# Altium PCB PCB走線.pcbdoc (part 1 of 2)
Units mm, origin at the board's own origin, x right, y up, seen from the top; angles counter-clockwise.
Board outline 119.98 x 131.06 mm, 2 copper layers (Top Layer, Bottom Layer); 151 components, 85 nets, 449 pads, 663 vias.
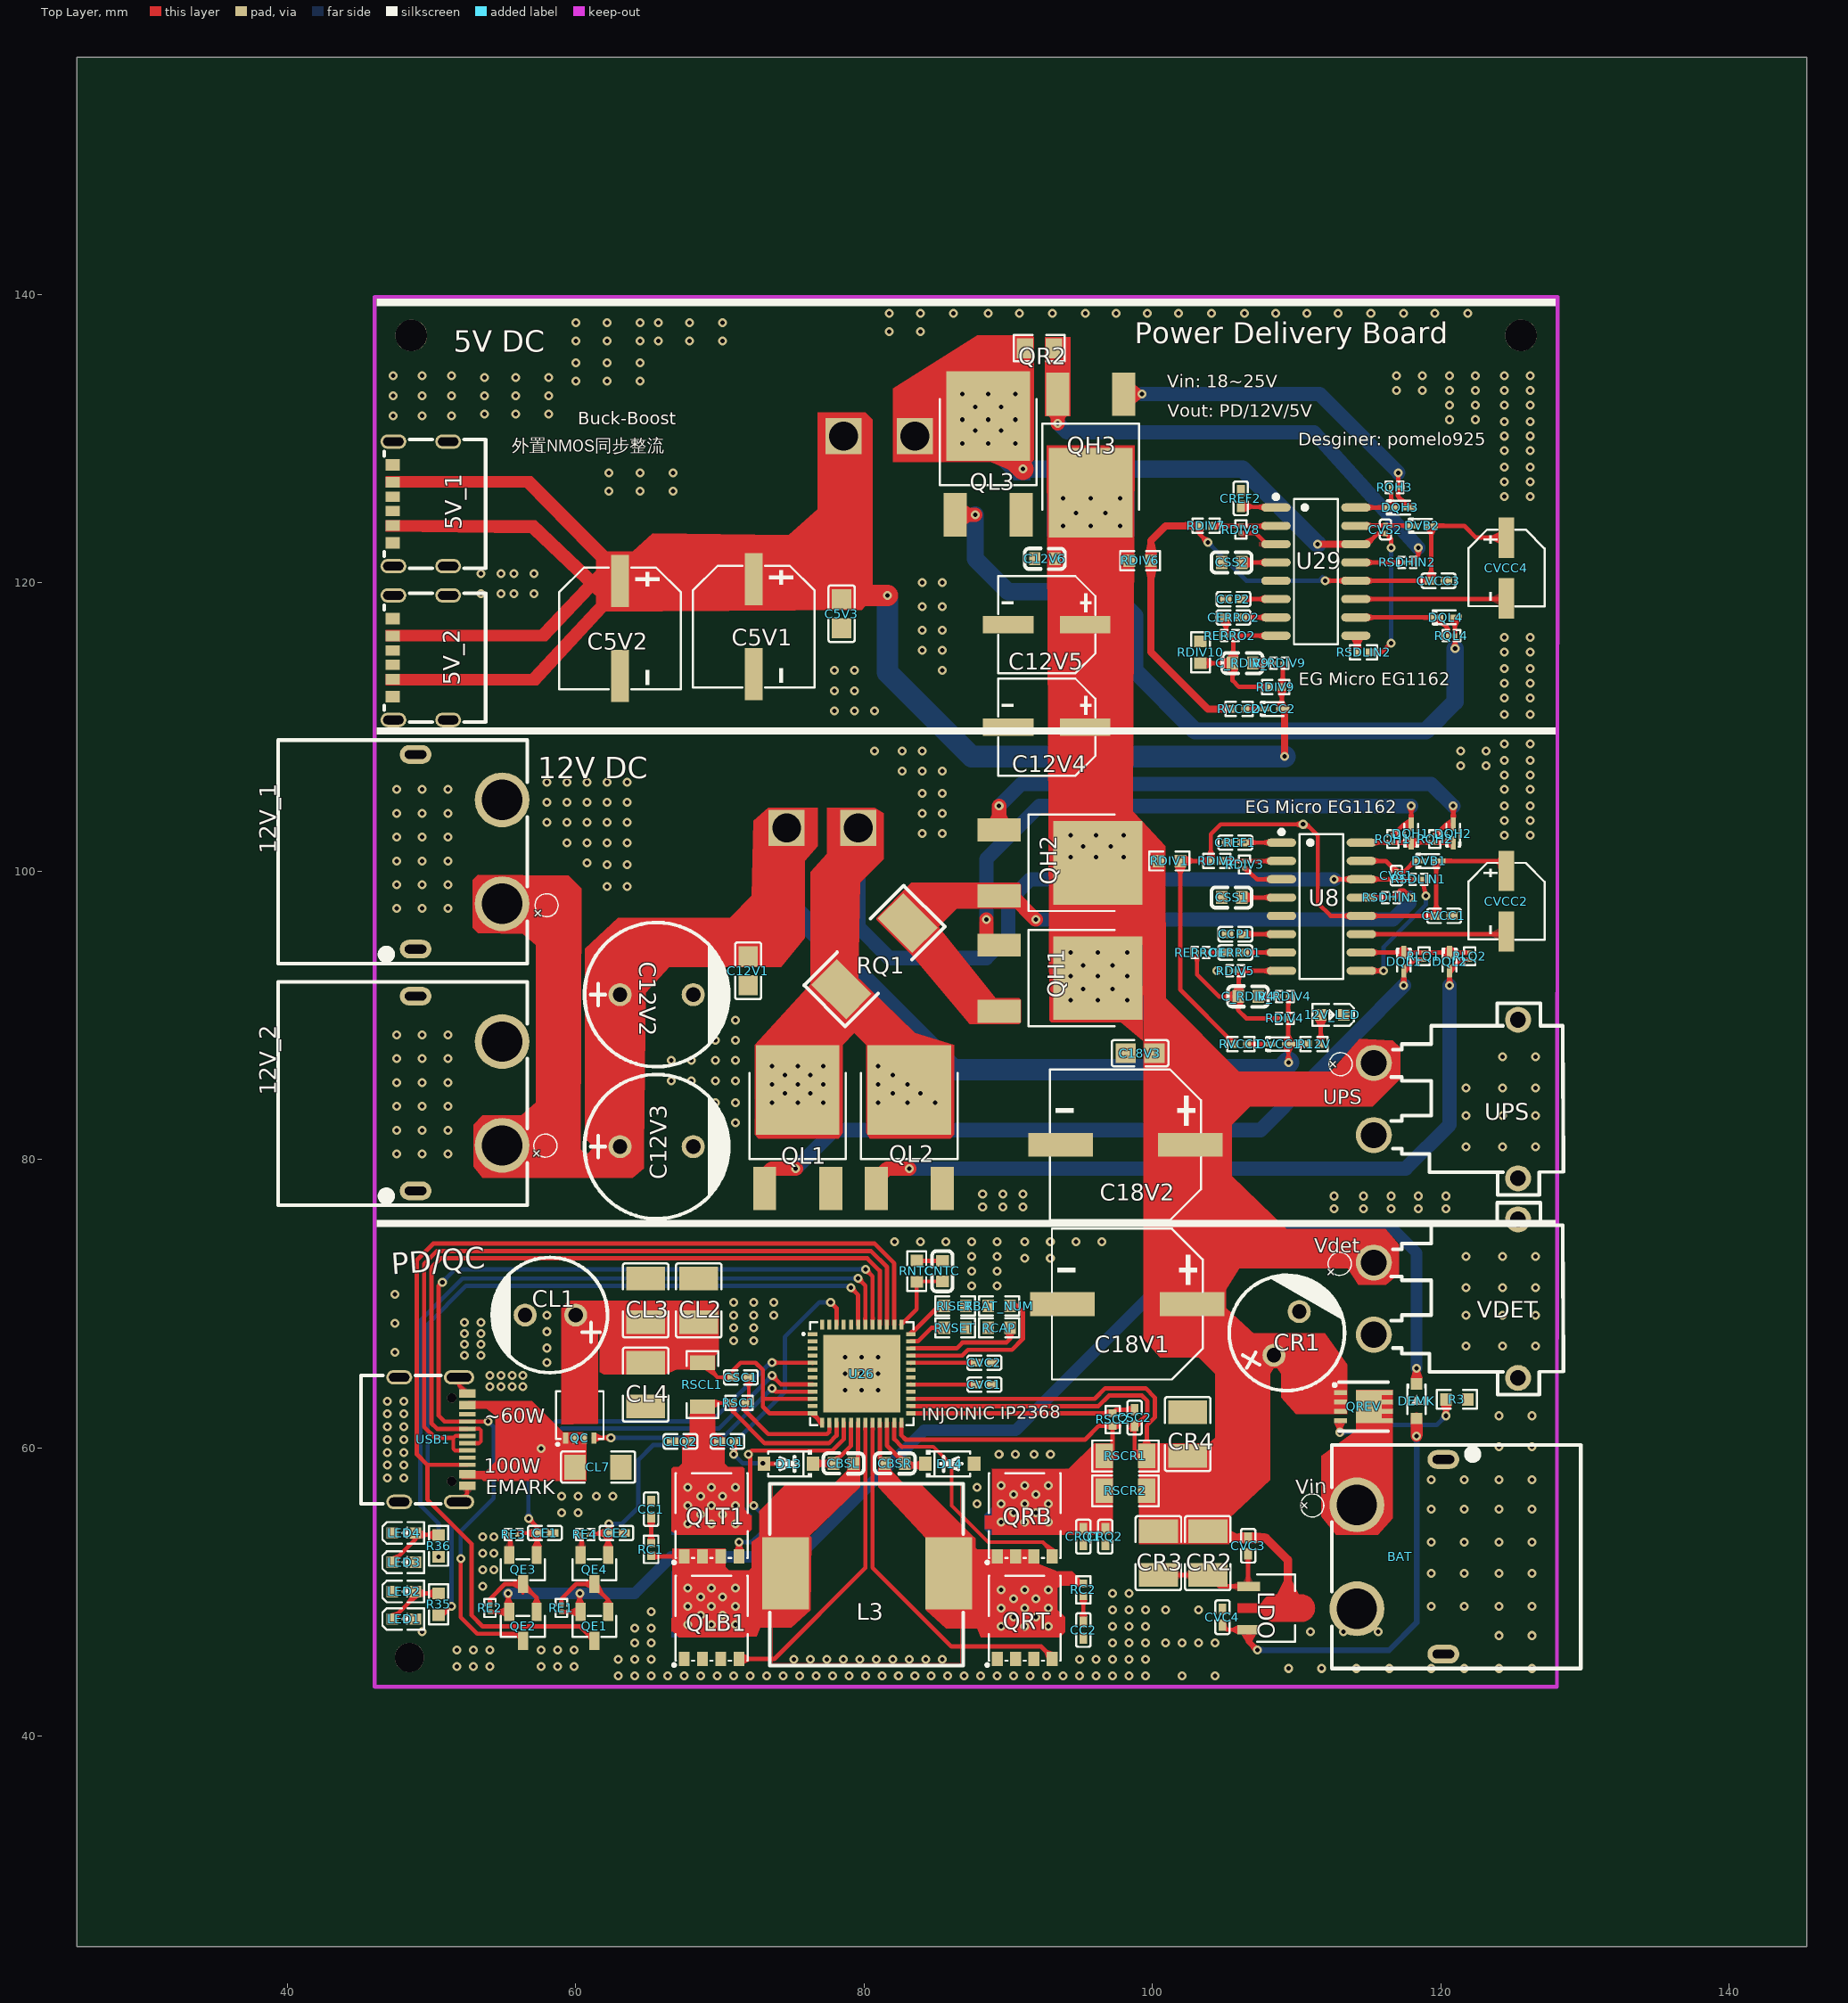
[diagram p0: Top Layer view]
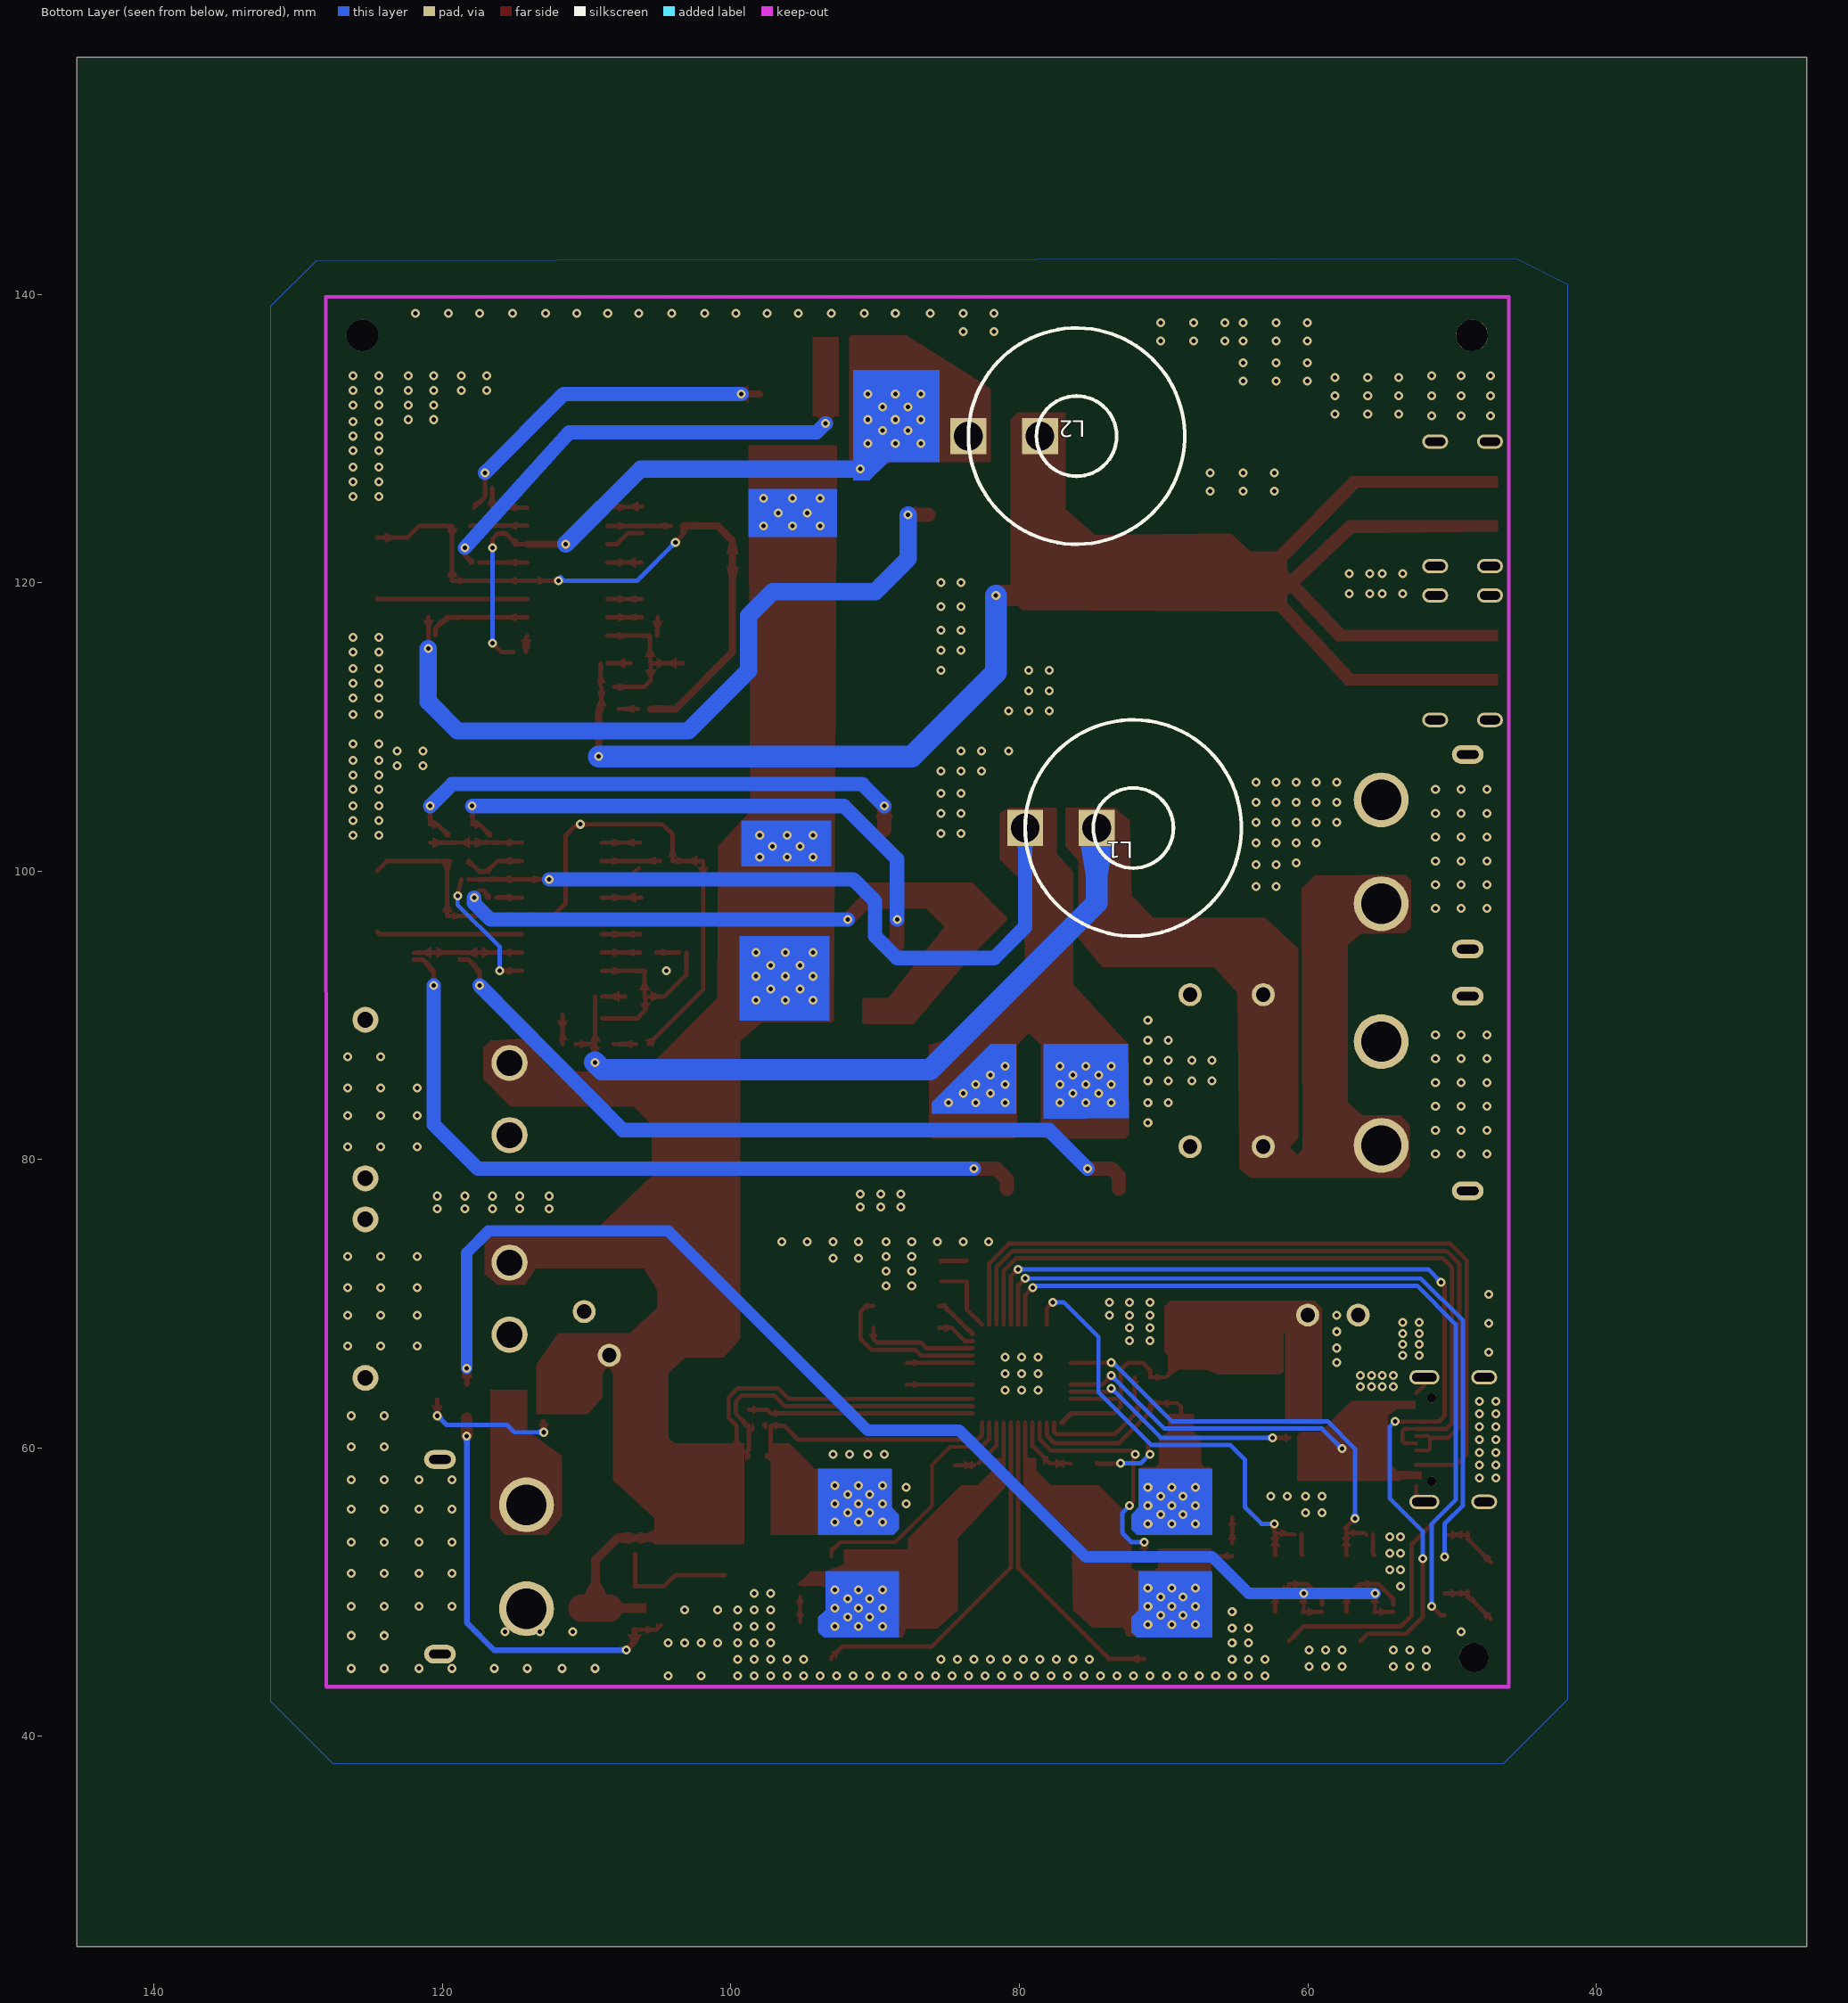
[diagram p1: Bottom Layer view, seen from below]

## Layer stack, top to bottom
Top Layer: signal copper (thickness not stored)
Dielectric: dielectric 0.32, FR-4, Dk 4.8
Bottom Layer: signal copper (thickness not stored)

## Board outline
145.377,25.4 25.4,25.4 25.4,156.464 145.377,156.464

## Components (designator, comment, footprint, x,y, rotation, side; value= is the part's Value field where it differs from the comment)
5V_1 "TYPE-C 6P" USB-C-SMD_TYPE-C-6P 49.238,125.476 r90 top
5V_2 "TYPE-C 6P" USB-C-SMD_TYPE-C-6P 49.238,114.808 r90 top
12V_1 "XT60PW-F" TH_2P-XT60PW-F 51.905,101.346 r90 top
12V_2 "XT60PW-F" TH_2P-XT60PW-F 51.905,84.582 r90 top
12V_LED "XL-1608UGC" LED0603-RD_GREEN 112.484,90.043 r180 top
BAT "XT60PW-F" TH_2P-XT60PW-F 117.183,52.451 r270 top
C5V1 "1000uF/10V" CAP-SMD_BD8.0-L8.3-W8.3-LS9.1-FD 72.352,116.967 r270 top
C5V2 "1000uF/10V" CAP-SMD_BD8.0-L8.3-W8.3-LS9.1-FD 63.081,116.84 r270 top
C5V3 "1uF/35V" C0805 78.448,117.856 r270 top
C12V1 "1uF/35V" C0805 71.971,93.091 r270 top
C12V2 "1000uF/25V" CAP-TH_BD10.0-P5.00-D1.0-FD 65.621,91.44 r0 top
C12V3 "1000uF/25V" CAP-TH_BD10.0-P5.00-D1.0-FD 65.621,80.899 r0 top
C12V4 "100uF" CAP-SMD_BD6.3-L6.6-W6.6-FD 92.672,109.982 r180 top
C12V5 "100uF" CAP-SMD_BD6.3-L6.6-W6.6-FD 92.672,117.094 r180 top
C12V6 "100nF" C0603 92.545,121.666 r0 top
C18V1 "470uF" CAP-SMD_BD10.0-L10.3-W10.3-FD 98.26,69.977 r180 top
C18V2 "470uF" CAP-SMD_BD10.0-L10.3-W10.3-FD 98.133,81.026 r180 top
C18V3 "1uF/35V" C0805 99.149,87.376 r180 top
C_RDIV4 "10nF/50V/1%" C0603 106.642,91.313 r0 top
C_RDIV9 "10nF/50V/1%" C0603 106.261,114.427 r0 top
CBSL "100nF" C0603 78.575,58.928 r180 top
CBSR "100nF" C0603 82.131,58.928 r180 top
CC1 "1.5nF" C0402 65.24,55.753 r90 top
CC2 "1.5nF" C0402 95.212,47.371 r270 top
CCP1 "68pF" C0402 105.753,95.631 r0 top
CCP2 "68pF" C0402 105.626,118.872 r0 top
CE1 "100nF" C0402 57.874,54.102 r180 top
CE2 "100nF" C0402 62.827,54.102 r180 top
CERRO1 "10nF/35V" C0402 105.753,94.361 r0 top
CERRO2 "10nF/35V" C0402 105.626,117.602 r0 top
CL1 "220uF" CAP-TH_BD8.0-P3.50-D0.6-FD 58.255,69.215 r180 top
CL2 "22uF" C1210 68.542,70.231 r270 top
CL3 "22uF" C1210 64.859,70.231 r270 top
CL4 "22uF" C1210 64.859,64.389 r90 top
CL7 "10uF" C1206 61.557,58.674 r180 top
CLQ1 "100nF" C0402 70.53,60.452 r180 top
CLQ2 "100nF" C0402 67.272,60.452 r0 top
CNTC "100nF" C0603 85.433,72.263 r90 top
CR1 "220uF" CAP-TH_BD8.0-P3.50-D0.6-FD 109.309,67.945 r60 top
CR2 "22uF" C1210 103.848,52.705 r90 top
CR3 "22uF" C1210 100.419,52.705 r90 top
CR4 "22uF" C1210 102.451,60.96 r270 top
CREF1 "100nF/35V" C0402 105.753,101.981 r180 top
CREF2 "100nF/35V" C0402 106.134,125.857 r90 top
CRQ1 "100nF" C0402 95.212,53.848 r90 top
CRQ2 "100nF" C0402 96.736,53.848 r90 top
CSC1 "1uF" C0402 71.463,64.897 r0 top
CSC2 "1uF" C0402 98.768,62.103 r90 top
CSS1 "100pF/50V" C0603 105.499,98.171 r0 top
CSS2 "100pF/50V" C0603 105.499,121.412 r0 top
CVC1 "2.2uF" C0402 88.354,64.389 r180 top
CVC2 "2.2uF" C0402 88.354,65.913 r180 top
CVC3 "2.2uF" C0402 106.642,53.213 r90 top
CVC4 "2.2uF" C0402 104.864,48.26 r270 top
CVCC1 "100nF/35V" C0402 120.231,96.901 r0 top
CVCC2 "10uF/50V" CAP-SMD_BD5.0-L5.3-W5.3-LS6.0-FD 124.549,97.917 r270 top
CVCC3 "100nF/35V" C0402 119.85,120.142 r0 top
CVCC4 "10uF/50V" CAP-SMD_BD5.0-L5.3-W5.3-FD 124.549,121.031 r270 top
CVS1 "1uF" C0201 116.929,99.695 r270 top
CVS2 "1uF" C0201 116.167,123.698 r270 top
D13 "SMF30A" SOD-123_L2.6-W1.6-LS3.5-RD 74.765,58.901 r180 top
D14 "SMF30A" SOD-123_L2.6-W1.6-LS3.5-RD 85.941,58.901 r0 top
DEMK "1SS355" SOD-323F_L1.7-W1.3-LS2.5-RD 118.326,63.246 r270 top
DQH1 "1N4148" SOD-523_L1.2-W0.8-LS1.6-RD 117.945,102.616 r90 top
DQH2 "1N4148" SOD-523_L1.2-W0.8-LS1.6-RD 120.866,102.616 r90 top
DQH3 "1N4148" SOD-523_L1.2-W0.8-LS1.6-RD 117.183,125.222 r0 top
DQL1 "1N4148" SOD-523_L1.2-W0.8-LS1.6-RD 117.437,93.726 r270 top
DQL2 "1N4148" SOD-523_L1.2-W0.8-LS1.6-RD 120.612,93.726 r270 top
DQL4 "1N4148" SOD-523_L1.2-W0.8-LS1.6-RD 120.358,117.602 r0 top
DVB1 "1N4148" SOD-523_L1.2-W0.8-LS1.6-RD 119.215,100.711 r0 top
DVB2 "1N4148" SOD-523_L1.2-W0.8-LS1.6-RD 118.707,123.952 r0 top
DVCC1 "1N4148" SOD-523_L1.2-W0.8-LS1.6-RD 108.801,88.011 r0 top
DVCC2 "1N4148" SOD-523_L1.2-W0.8-LS1.6-RD 108.42,111.252 r0 top
L1 "47uH/40A" 鐵硅鋁電感 72.098,102.997 r180 bottom
L2 "33uH/40A" 鐵硅鋁電感 76.035,130.175 r180 bottom
L3 "5.6uH/13A" IND-SMD_L13.4-W12.6 80.226,51.308 r0 top
LDO "ME6203A50PG" SOT-89_L4.5-W2.5-P1.50-LS4.2-BR 108.039,48.895 r180 top
LED1 "75%" LED0603-RD 48.095,48.133 r0 top
LED2 "100%" LED0603-RD 48.095,50.038 r0 top
LED3 "75%" LED0603-RD 48.095,52.07 r0 top
LED4 "100%" LED0603-RD 48.095,54.102 r0 top
QC "WSD3066DN33" DFN-8_L3.3-W3.3-P0.65-BL 60.287,61.468 r0 top
QE1 "2301" SOT-23-3_L2.9-W1.3-P1.90-LS2.4-BR 61.303,47.625 r90 top
QE2 "2301" SOT-23-3_L2.9-W1.3-P1.90-LS2.4-BR 56.35,47.625 r90 top
QE3 "2N7002" SOT-23-3_L2.9-W1.3-P1.90-LS2.4-BR 56.35,51.562 r90 top
QE4 "2N7002" SOT-23-3_L2.9-W1.3-P1.90-LS2.4-BR 61.303,51.562 r90 top
QH1 "AP90N04K" TO-252-2_L6.6-W6.1-P4.57-LS9.9-BR-CW 92.799,92.583 r180 top
QH2 "AP90N04K" TO-252-2_L6.6-W6.1-P4.57-LS9.9-BR-CW 92.799,100.584 r180 top
QH3 "AP90N04K" TO-252-2_L6.6-W6.1-P4.57-LS9.9-BR-CW 95.72,129.667 r90 top
QL1 "AP90N04K" TO-252-2_L6.6-W6.1-P4.57-LS9.9-BR-CW 75.4,81.407 r270 top
QL2 "AP90N04K" TO-252-2_L6.6-W6.1-P4.57-LS9.9-BR-CW 83.147,81.407 r270 top
QL3 "AP90N04K" TO-252-2_L6.6-W6.1-P4.57-LS9.9-BR-CW 88.608,128.143 r270 top
QLB1 "5C670" DFN-5_L6.1-W5.1-P1.27-BL 69.431,47.244 r0 top
QLT1 "5C670" DFN-5_L6.1-W5.1-P1.27-BL 69.431,54.356 r0 top
QR2 "9mΩ" R0805 92.164,136.271 r0 top
QRB "5C670" DFN-5_L6.1-W5.1-P1.27-BL 91.148,54.356 r0 top
QREV "BSZ120P03NS3GATMA1" PG-TSDSON-8_L3.3-W3.3-P0.65-BL 114.643,62.865 r270 top
QRT "5C670" DFN-5_L6.1-W5.1-P1.27-BL 91.148,47.244 r0 top
R3 "2kΩ" R0603 121.12,63.373 r180 top
R12V "2.1kΩ" R0402 111.214,88.011 r0 top
R35 "100Ω" R0603 50.508,49.149 r270 top
R36 "100Ω" R0603 50.508,53.213 r270 top
R_RDIV4 "510Ω/25V" R0201 109.182,91.313 r0 top
R_RDIV9 "510Ω/25V" R0201 108.801,114.427 r0 top
RBAT_NUM "18kΩ" R0603 89.37,69.85 r180 top
RC1 "2Ω" R0402 65.24,52.959 r90 top
RC2 "2Ω" R0402 95.212,50.165 r270 top
RCAP "7.5kΩ" R0603 89.37,68.326 r180 top
RDIV1 "16.9kΩ" R0603 101.181,100.711 r180 top
RDIV2 "56kΩ" R0402 104.483,100.711 r180 top
RDIV3 "4.22kΩ" R0201 106.388,100.457 r90 top
RDIV4 "9.1kΩ/1%" R0201 109.182,89.789 r0 top
RDIV5 "1kΩ/1%" R0201 105.753,93.091 r180 top
RDIV6 "16.9kΩ" R0603 99.149,121.539 r0 top
RDIV7 "56kΩ" R0402 103.721,123.952 r180 top
RDIV8 "4.22kΩ/25V" R0201 106.134,123.698 r90 top
RDIV9 "3.9kΩ/50V" R0402 108.547,112.776 r0 top
RDIV10 "1.2kΩ" R0603 103.34,115.189 r270 top
RE1 "10kΩ" R0201 59.017,48.895 r270 top
RE2 "10kΩ" R0201 54.064,48.895 r270 top
RE3 "1MΩ" R0201 55.715,53.994 r180 top
RE4 "1MΩ" R0201 60.668,53.994 r180 top
RERRO1 "100kΩ/30V" R0201 103.34,94.361 r0 top
RERRO2 "100kΩ/30V" R0201 105.372,116.332 r180 top
RISET "25kΩ" R0603 86.322,69.85 r0 top
RLQ1 "15Ω" R0201 118.834,94.107 r270 top
RLQ2 "15Ω" R0201 122.009,94.107 r270 top
RNTC "10kΩ" R0603 83.655,72.263 r90 top
RQ1 "6mΩ" RES-SMD_L6.4-W3.2 80.734,94.107 r45 top
RQH1 "15Ω" R0201 116.675,102.235 r90 top
RQH2 "15Ω" R0201 119.596,102.235 r90 top
RQH3 "5.1Ω/25V" R0201 116.802,126.619 r0 top
RQL4 "5.1Ω/25V" R0201 120.739,116.332 r0 top
RSC1 "10Ω" R0402 71.336,63.119 r0 top
RSC2 "10Ω" R0402 97.244,61.976 r90 top
RSCL1 "5mΩ" RES-SMD_L3.2-W1.6_PA1206 68.796,64.389 r270 top
RSCR1 "10mΩ" R1206 98.133,59.436 r0 top
RSCR2 "10mΩ" R1206 98.133,57.023 r0 top
RSDHIN1 "10kΩ" R0201 116.548,98.171 r0 top
RSDHIN2 "10kΩ" R0201 117.691,121.412 r0 top
RSDLIN1 "100kΩ/30V" R0201 118.453,99.441 r180 top
RSDLIN2 "100kΩ/50V" R0402 114.643,115.189 r0 top
RVCC1 "5.1Ω/50V" R0402 106.134,88.011 r180 top
RVCC2 "5.1Ω/50V" R0402 106.007,111.252 r180 top
RVSET "10kΩ" R0603 86.322,68.326 r0 top
U8 "EG1162" SOP-16_L9.9-W3.9-P1.27-LS6.0-BL 111.722,97.536 r270 top
U26 "IP2368_BZ_VGLIP" QFN-48_L7.0-W7.0-P0.50-TL-EP5.4-1 79.845,65.151 r0 top
U29 "EG1162" SOP-16_L9.9-W3.9-P1.27-LS6.0-BL 111.341,120.777 r270 top
UPS "XT30PW-M" CONN-TH_XT30PW-M 120.358,84.201 r90 top
USB1 "TYPE-C16PIN" USB-C-SMD_TYPE-C16PIN 50.127,60.579 r270 top
VDET "XT30PW-M" CONN-TH_XT30PW-M 120.358,70.358 r90 top

## Footprints (in the part's own frame and the unit in brackets; to place one, negate y for a bottom-side part, rotate by r counter-clockwise, add the part's x,y. Pads: shape width x height; smd on the part's side, far side on the other; paste and mask are expansions set on the pad)
C0201 [mm]
  rect 0.368x0.324 smd paste-100 mask+0.051: 1(-0.274,0) 2(0.274,0)
  silkscreen extent -0.69,-0.39 0.69,0.39
C0402 [mm]
  rect 0.79x0.54 smd paste-100 mask+0.051: 1(-0.545,0) 2(0.545,0)
  silkscreen extent -1.17,-0.5 1.17,0.5
C0603 [mm]
  rect 0.8x0.9 smd paste+0 mask+0.051: 1(-0.7,0) 2(0.7,0)
  silkscreen extent -1.41,-0.71 1.39,0.72
C0805 [mm]
  rect 1.41x1.35 smd paste-100 mask+0.051: 1(-1,0) 2(1,0)
  silkscreen extent -1.96,-0.9 1.96,0.9
C1206 [mm]
  rect 1.485x1.728 smd paste-100 mask+0.051: 1(-1.593,0) 2(1.593,0)
  silkscreen extent -2.56,-1.09 2.56,1.09
C1210 [mm]
  rect 1.635x2.7 smd paste-100 mask+0.051: 1(-1.517,0) 2(1.517,0)
  silkscreen extent -2.56,-1.58 2.56,1.58
CAP-SMD_BD5.0-L5.3-W5.3-FD [mm]
  rect 2.8x1.1 smd paste+0 mask+0.051: 1(-2.1,0) 2(2.1,0)
  silkscreen extent -2.66,-2.62 2.66,2.65
CAP-SMD_BD5.0-L5.3-W5.3-LS6.0-FD [mm]
  rect 2.8x1.1 smd paste+0 mask+0.051: 1(-2.1,0) 2(2.1,0)
  silkscreen extent -2.66,-2.62 2.66,2.65
CAP-SMD_BD6.3-L6.6-W6.6-FD [mm]
  rect 3.5x1.2 smd paste+0 mask+0.051: 1(-2.67,0) 2(2.67,0)
  silkscreen extent -3.38,-3.38 3.38,3.38
CAP-SMD_BD8.0-L8.3-W8.3-LS9.1-FD [mm]
  rect 3.61x1.26 smd paste+0 mask+0.051: 1(-3.295,0) 2(3.295,0)
  silkscreen extent -4.23,-4.23 4.23,4.23
CAP-SMD_BD10.0-L10.3-W10.3-FD [mm]
  rect 4.5x1.65 smd paste+0 mask+0.051: 1(-4.5,0) 2(4.5,0)
  silkscreen extent -5.23,-5.23 5.23,5.23
CAP-TH_BD8.0-P3.50-D0.6-FD [mm]
  round 1.6 hole 1 paste+0 mask+0.051: 1(-1.75,0) 2(1.75,0)
  silkscreen extent -3.96,-4 4.04,4
CAP-TH_BD10.0-P5.00-D1.0-FD [mm]
  round 1.6 hole 1 paste+0 mask+0.051: 1(-2.54,0) 2(2.54,0)
  silkscreen extent -5,-5 5.08,5
CONN-TH_XT30PW-M [mm]
  round 2.5 hole 1.8 paste+0 mask+0.051: 1(-2.5,5) 2(2.5,5)
  round 1.8 hole 1.1 paste+0 mask+0.051: 3(5.5,-5) 4(-5.5,-5)
  silkscreen extent -6.65,-8.15 6.65,3.81
DFN-5_L6.1-W5.1-P1.27-BL [mm]
  rect 0.75x1 smd paste+0 mask+0.051: 1(-1.905,-1.875) 2(-0.635,-1.875) 3(0.635,-1.875) 4(1.905,-1.875)
  Top Layer region: -2.28,-0.39 -2.28,0.035 -2.775,0.035 -2.775,0.94 -2.28,0.94 -2.28,4.14 -1.53,4.14 -1.53,3.64 1.53,3.64 1.53,4.14 2.28,4.14 2.28,0.94 2.775,0.94 2.775,0.035 2.28,0.035 2.28,-0.39
  silkscreen extent -2.7,-2.4 2.5,3.9
DFN-8_L3.3-W3.3-P0.65-BL [mm]
  rect 0.35x0.75 smd paste+0 mask+0.05: 1(-0.975,-0.779) 2(-0.325,-0.779) 3(0.325,-0.779) 4(0.975,-0.779)
  Top Layer region: -1.222,0.201 -1.222,2.129 -1.174,2.129 -1.174,2.73 -0.773,2.73 -0.773,2.129 -0.524,2.129 -0.524,2.73 -0.123,2.73 -0.123,2.129 0.126,2.129 0.126,2.73 0.528,2.73 0.528,2.129 0.777,2.129 0.777,2.73 0.777,2.129 0.777,2.73 1.178,2.73 1.178,2.129 1.226,2.129 1.226,0.201
  silkscreen extent -1.65,-1.27 1.65,2.46
IND-SMD_L13.4-W12.6 [mm]
  rect 3.25x5 smd paste+0 mask+0.051: 1(-5.65,0) 2(5.65,0)
  silkscreen extent -6.75,-6.4 6.65,6.2
LED0603-RD [mm]
  rect 0.8x0.8 smd paste+0 mask+0.051: 1(-0.799,0) 2(0.799,0)
  silkscreen extent -1.49,-0.75 1.39,0.76
LED0603-RD_GREEN [mm]
  rect 0.8x0.8 smd paste+0 mask+0.051: 1(-0.799,-0.003) 2(0.799,0.004)
  silkscreen extent -1.49,-0.75 1.39,0.76
PG-TSDSON-8_L3.3-W3.3-P0.65-BL [mm]
  rect 0.35x0.9 smd paste-100 mask+0.051: 1(-0.975,-1.6) 2(-0.325,-1.6) 3(0.325,-1.6) 4(0.975,-1.6) 5(0.975,1.6) 6(0.325,1.6) 7(-0.325,1.6) 8(-0.975,1.6)
  rect 2.3x1.8 smd paste-100 mask+0.051: 9(0,0.36)
  silkscreen extent -1.7,-2.09 1.7,1.7
QFN-48_L7.0-W7.0-P0.50-TL-EP5.4-1 [mm]
  rect 0.665x0.28 smd paste-100 mask+0.05: 1(-3.408,2.75) 2(-3.408,2.25) 3(-3.408,1.75) 4(-3.408,1.25) 5(-3.408,0.75) 6(-3.408,0.25) 7(-3.408,-0.25) 8(-3.408,-0.75) 9(-3.408,-1.25) 10(-3.408,-1.75) 11(-3.408,-2.25) 12(-3.408,-2.75) 25(3.407,-2.75) 26(3.407,-2.25) 27(3.407,-1.75) 28(3.407,-1.25) 29(3.407,-0.75) 30(3.407,-0.25) 31(3.407,0.25) 32(3.407,0.75) 33(3.407,1.25) 34(3.407,1.75) 35(3.407,2.25) 36(3.407,2.75)
  rect 0.28x0.665 smd paste-100 mask+0.05: 13(-2.75,-3.407) 14(-2.25,-3.407) 15(-1.75,-3.407) 16(-1.25,-3.407) 17(-0.75,-3.407) 18(-0.25,-3.407) 19(0.25,-3.407) 20(0.75,-3.407) 21(1.25,-3.407) 22(1.75,-3.407) 23(2.25,-3.407) 24(2.75,-3.407) 37(2.75,3.408) 38(2.25,3.408) 39(1.75,3.408) 40(1.25,3.408) 41(0.75,3.408) 42(0.25,3.408) 43(-0.25,3.408) 44(-0.75,3.408) 45(-1.25,3.408) 46(-1.75,3.408) 47(-2.25,3.408) 48(-2.75,3.408)
  rect 5.35x5.35 smd paste-100 mask+0.05: 49(0,0)
  silkscreen extent -4.11,-3.58 3.58,3.58
R0201 [mm]
  rect 0.303x0.324 smd paste-100 mask+0.051: 1(-0.242,0) 2(0.242,0)
  silkscreen extent -0.62,-0.39 0.62,0.39
R0402 [mm]
  rect 0.566x0.54 smd paste-100 mask+0.051: 1(-0.433,0) 2(0.433,0)
  silkscreen extent -0.94,-0.5 0.94,0.5
R0603 [mm]
  rect 0.806x0.864 smd paste-100 mask+0.051: 1(-0.753,0) 2(0.753,0)
  silkscreen extent -1.39,-0.66 1.39,0.66
R0805 [mm]
  rect 1.133x1.377 smd paste-100 mask+0.051: 1(-1,0) 2(1,0)
  silkscreen extent -1.76,-0.92 1.76,0.92
R1206 [mm]
  rect 1.208x1.701 smd paste-100 mask+0.051: 1(-1.479,0) 2(1.479,0)
  silkscreen extent -2.31,-1.08 2.31,1.08
RES-SMD_L3.2-W1.6_PA1206 [mm]
  rect 1x1.728 smd paste+0 mask+0.051: 1(-1.524,0) 2(1.524,0)
  silkscreen extent -2.31,-1.09 2.31,1.09
RES-SMD_L6.4-W3.2 [mm]
  rect 2.5x3.4 smd paste+0 mask+0.051: 1(-3.25,0) 2(3.25,0)
  silkscreen extent -4.89,-2 4.89,2.03
SOD-123_L2.6-W1.6-LS3.5-RD [mm]
  rect 0.88x0.99 smd paste+0 mask+0.051: 1(-1.693,0) 2(1.693,0)
  silkscreen extent -1.63,-0.94 1.41,0.94
SOD-323F_L1.7-W1.3-LS2.5-RD [mm]
  rect 0.8x0.8 smd paste+0 mask+0.051: 1(-1.2,0) 2(1.2,0)
  silkscreen extent -1.14,-0.64 0.89,0.64
SOD-523_L1.2-W0.8-LS1.6-RD [mm]
  rect 0.93x0.36 smd paste+0 mask+0.051: 1(-0.635,0) 2(0.635,0)
  silkscreen extent -0.91,-0.55 0.68,0.55
SOP-16_L9.9-W3.9-P1.27-LS6.0-BL [mm]
  oval 0.574x2.038 smd paste+0 mask+0.051: 1(-4.445,-2.769) 2(-3.175,-2.769) 3(-1.905,-2.769) 4(-0.635,-2.769) 5(0.635,-2.769) 6(1.905,-2.769) 7(3.175,-2.769) 8(4.445,-2.769) 9(4.445,2.769) 10(3.175,2.769) 11(1.905,2.769) 12(0.635,2.769) 13(-0.635,2.769) 14(-1.905,2.769) 15(-3.175,2.769) 16(-4.445,2.769)
  silkscreen extent -5.33,-2.92 5.03,1.52
SOT-23-3_L2.9-W1.3-P1.90-LS2.4-BR [mm]
  rect 1.25x0.7 smd paste+0 mask+0.051: 1(1,-0.95) 2(1,0.95) 3(-1,0)
  silkscreen extent -0.73,-1.53 0.73,1.53
SOT-89_L4.5-W2.5-P1.50-LS4.2-BR [mm]
  rect 1.575x0.672 smd paste+0 mask+0.051: 1(1.356,-1.5) 3(1.356,1.5)
  Top Layer region: -2.283,0.959 -0.429,0.959 -0.385,0.958 -0.34,0.955 -0.296,0.949 -0.252,0.942 -0.208,0.933 -0.165,0.921 -0.123,0.908 -0.081,0.893 -0.04,0.875 0,0.856 0.04,0.835 0.078,0.812 0.115,0.788 0.151,0.761 0.185,0.733 0.219,0.704 0.251,0.673 0.281,0.64 0.31,0.606 0.337,0.571 0.362,0.534 0.386,0.497 0.408,0.458 0.428,0.418 0.447,0.339 2.144,0.339 2.144,-0.321 0.447,-0.321 0.428,-0.401 0.408,-0.44 0.386,-0.479 0.362,-0.517 0.337,-0.553 0.31,-0.588 0.281,-0.622 0.251,-0.655 0.219,-0.686 0.185,-0.716 0.151,-0.744 0.115,-0.77 0.078,-0.795 0.04,-0.818 0,-0.839 -0.04,-0.858 -0.081,-0.875 -0.123,-0.89 -0.165,-0.904 -0.208,-0.915 -0.252,-0.925 -0.296,-0.932 -0.34,-0.937 -0.385,-0.94 -0.429,-0.941 -2.283,-0.941 -2.328,-0.94 -2.372,-0.937 -2.416,-0.932 -2.46,-0.925 -2.504,-0.915 -2.547,-0.904 -2.589,-0.89 -2.631,-0.875 -2.672,-0.858 -2.713,-0.839 -2.752,-0.818 -2.79,-0.795 -2.827,-0.77 -2.863,-0.744 -2.898,-0.716 -2.931,-0.686 -2.963,-0.655 -2.993,-0.622 -3.022,-0.588 -3.049,-0.553 -3.075,-0.517 -3.098,-0.479 -3.12,-0.44 -3.141,-0.401 -3.159,-0.36 -3.175,-0.318 -3.189,-0.276 -3.202,-0.233 -3.212,-0.19 -3.22,-0.146 -3.227,-0.102 -3.231,-0.058 -3.233,-0.013 -3.233,0.031 -3.231,0.076 -3.227,0.12 -3.22,0.164 -3.212,0.208 -3.202,0.251 -3.189,0.294 -3.175,0.336 -3.159,0.377 -3.141,0.418 -3.12,0.458 -3.098,0.497 -3.075,0.534 -3.049,0.571 -3.022,0.606 -2.993,0.64 -2.963,0.673 -2.931,0.704 -2.898,0.733 -2.863,0.761 -2.827,0.788 -2.79,0.812 -2.752,0.835 -2.713,0.856 -2.672,0.875 -2.631,0.893 -2.589,0.908 -2.547,0.921 -2.504,0.933 -2.46,0.942 -2.416,0.949 -2.372,0.955 -2.328,0.958
  silkscreen extent -1.87,-2.33 0.78,2.33
TH_2P-XT60PW-F [mm]
  oval 1.3x2.2 hole 0.6 slot 1.5 at 90 deg paste+0 mask+0.05: 1(-6.75,3) 2(6.75,3)
  round 3.8 hole 2.8 paste+0 mask+0.05: 3(-3.6,-3) 4(3.6,-3)
  silkscreen extent -7.75,-4.75 7.75,12.52
TO-252-2_L6.6-W6.1-P4.57-LS9.9-BR-CW [mm]
  rect 3x1.6 smd paste+0 mask+0.051: 1(3.424,-2.29) 3(3.424,2.29)
  rect 6.2x5.8 smd paste+0 mask+0.051: 2(-3.424,0)
  silkscreen extent -4.58,-3.35 1.38,3.35
USB-C-SMD_TYPE-C16PIN [mm]
  oval 1x2.1 hole 0.6 slot 1.7 at 90 deg paste+0 mask+0.051: 1(-4.32,1.787) 2(4.32,1.787)
  oval 1x1.8 hole 0.6 slot 1.4 at 90 deg paste+0 mask+0.051: 3(-4.32,-2.362) 4(4.32,-2.362)
  rect 0.6x1.15 smd paste-100 mask+0.051: A1B12(-3.2,2.362) A4B9(-2.4,2.362) B1A12(3.2,2.362) B4A9(2.4,2.362)
  rect 0.3x1.15 smd paste-100 mask+0.051: A5(-1.25,2.362) A6(-0.25,2.362) A7(0.25,2.362) A8(-1.75,2.362) B5(1.75,2.362) B6(0.75,2.362) B7(-0.75,2.362) B8(1.25,2.362)
  round 0.65 hole 0.65 unplated paste+0: ""(-2.89,1.288) ""(2.89,1.288)
  silkscreen extent -4.45,-5 4.45,0.52
USB-C-SMD_TYPE-C-6P [mm]
  oval 1x1.8 hole 0.6 slot 1.4 at 90 deg paste+0 mask+0.05: 1(-4.32,-1.925) 1(-4.32,1.875) 2(4.32,-1.925) 2(4.32,1.875)
  rect 0.7x1 smd paste-100 mask+0.05: A5(-0.499,1.925) B5(0.501,1.925)
  rect 0.75x1 smd paste-100 mask+0.05: A9(1.501,1.925) B9(-1.499,1.925)
  rect 0.8x1 smd paste-100 mask+0.05: A12(2.701,1.925) B12(-2.699,1.925)
  silkscreen extent -4.47,-4.52 4.47,2.5
鐵硅鋁電感 [mm]
  rect 2.5x2.5 hole 2 paste+0 mask+0.051: 1(-7.5,0) 2(-2.54,0)
  silkscreen extent -7.5,-7.5 7.5,7.5

## Free pads (board coordinates)
  round 2.032 hole 2.032 unplated paste+0: ""(48.476,45.466)
  round 2.2 hole 2.2 unplated paste+0: ""(48.603,137.16) ""(125.565,137.16)

## Via types
v1: diameter 0.62, hole 0.31, Top Layer to Bottom Layer, tented both sides, 659 vias
v2: diameter 0.61, hole 0.305, Top Layer to Bottom Layer, tented both sides, 4 vias

## Nets (pads, with @x,y where several pads share a name; then routed paths per layer and width w, separated by ;. In a path a pad name is that pad's centre, name@x,y a point inside that pad or via, vN(x,y) a via of type N, cw(c..) or ccw(c..) an arc to the next point about the centre after c; other vN are vias at no path point)
5V: 5V_1.A9 5V_1.B9 5V_2.A9 5V_2.B9 C5V1.1 C5V2.1 C5V3.1 DVCC2.2 L2.2 R_RDIV9.2 RDIV9.2 | length 45.2
  Top Layer w0.3: R_RDIV9.2@109.043,114.427 109.043,112.84 108.979,112.776 108.979,111.252 DVCC2.2@109.055,111.252
  Top Layer w0.5: DVCC2.2@109.055,111.252 109.182,111.125 v1(109.182,107.95)
  Top Layer w1.5: C5V3.1@78.448,118.856 78.718,119.126 v1(81.623,119.126)
  Bottom Layer w1.5: v1(81.623,119.126) 81.623,113.792 87.465,107.95 v1(109.182,107.95)
12V: 12V_1.3 12V_2.3 C12V1.1 C12V2.1 C12V3.1 DVCC1.2 L1.2 R12V.1 R_RDIV4.2 RDIV4.2 | length 50.9
  Top Layer w0.3: R_RDIV4.2@109.424,91.313 RDIV4.2@109.424,89.789 109.424,88.024 DVCC1.2@109.436,88.011 ; v1(109.436,86.741) DVCC1.2@109.436,88.011 ; R12V.1@110.782,88.011 DVCC1.2@109.436,88.011
  Bottom Layer w1.5: L1.2@74.638,102.997 74.638,97.79 86.195,86.233 108.928,86.233 v1(109.436,86.741)
BAT_M: CE2.2 QE4.1 RE4.1 U26.46 | length 31.2
  Top Layer w0.3: RE4.1@60.91,53.993 RE4.1@60.91,53.994 CE2.2@62.281,54.102 ; QE4.1@62.253,52.562 62.253,54.074 CE2.2@62.281,54.102 ; v1(62.319,54.737) 62.319,54.14 CE2.2@62.281,54.102 ; v1(77.686,70.104) 78.095,69.695 U26.46@78.095,68.559
  Bottom Layer w0.3: v1(62.319,54.737) 63.208,54.737 64.351,55.88 64.351,59.182 65.367,60.198 70.828,60.198 74.511,63.881 74.511,67.691 76.924,70.104 v1(77.686,70.104)
BAT_N: RBAT_NUM.1 U26.33 | length 11.2
  Top Layer w0.3: U26.33@83.253,66.401 86.81,66.401 87.211,66.802 90.259,66.802 91.021,67.564 91.021,69.469 90.64,69.85 RBAT_NUM.1@90.124,69.85
BST1: CBSL.2 D13.1 U26.17 | length 4.8
  Top Layer w0.254: D13.1@76.457,58.9 76.485,58.928 CBSL.2@77.874,58.928
  Top Layer w0.3: CBSL.2@77.874,58.928 79.096,60.147 U26.17@79.095,61.744
BST2: CBSR.1 D14.1 U26.22 | length 4.8
  Top Layer w0.254: CBSR.1@83.086,58.829 83.112,58.801 D14.1@84.504,58.801
  Top Layer w0.3: U26.22@81.595,61.744 81.595,60.165 CBSR.1@82.831,58.928
CC1: QE2.3 U26.41 USB1.A5 | length 66.4
  Top Layer w0.3: v1(50.762,71.501) 50.508,71.247 50.508,62.23 50.91,61.829 USB1.A5@52.49,61.829 ; v1(52.032,52.324) 52.032,48.26 53.175,47.117 55.842,47.117 QE2.3@56.35,46.609 ; USB1.A5@52.49,61.829 v1(53.937,61.849) ; v1(80.099,72.39) 80.595,71.895 U26.41@80.595,68.559
  Bottom Layer w0.3: v1(50.762,71.501) 51.651,72.39 v1(80.099,72.39) ; v1(52.032,52.324) 52.032,54.229 54.318,56.515 54.318,61.468 v1(53.937,61.849)
CC1_1: CC1.1 RC1.2 | length 1.8
  Top Layer w0.3: RC1.2@65.24,53.392 CC1.1@65.24,55.208
CC2: QE1.3 U26.38 USB1.B5 | length 76.6
  Top Layer w0.3: USB1.B5@52.49,58.829 49.718,58.829 ; QE1.3@61.303,46.625 60.303,47.625 53.556,47.625 52.794,48.387 52.794,53.34 49.718,56.416 49.718,58.829 ; U26.38@82.095,68.559 82.096,72.807 80.734,74.168 50.127,74.168 48.984,73.025 48.984,59.563 49.718,58.829
CERRO1_1: CERRO1.1 RERRO1.2 | length 1.6
  Top Layer w0.3: RERRO1.2@103.582,94.361 CERRO1.1@105.207,94.361
CERRO2_2: CERRO2.2 U29.7 | length 2.4
  Top Layer w0.3: CERRO2.2@106.171,117.602 U29.7@108.572,117.602
CREF2_1: CREF2.1 U29.1 | length 2.4
  Top Layer w0.3: CREF2.1@106.134,125.312 U29.1@108.572,125.222
CSC1_1: CL1.1 CL2.2 CL3.2 CL4.2 CSC1.1 RSCL1.1 U26.10 U26.12 U26.13 | length 16.4
  Top Layer w0.254: RSCL1.1@68.796,65.913 69.812,64.897 CSC1.1@70.917,64.897
  Top Layer w0.3: CSC1.1@70.917,64.897 70.917,65.392 71.438,65.913 72.479,65.913 72.987,65.405 72.987,63.401 U26.10@76.437,63.401 ; 72.987,63.754 72.987,62.865 73.452,62.4 76.437,62.4 U26.13@77.095,61.742
CSC1_2: CSC1.2 RSC1.2 U26.14 | length 9.6
  Top Layer w0.254: RSC1.2@71.768,63.119 72.01,63.358 CSC1.2@72.008,64.897
  Top Layer w0.3: RSC1.2@71.768,63.119 71.768,62.56 73.368,60.96 77.432,60.96 77.595,61.123 U26.14@77.595,61.744
CSN2: CSC2.2 RSC2.2 U26.25 | length 15.6
  Top Layer w0.3: U26.25@83.253,62.401 83.262,62.408 RSC2.2@97.244,62.409 97.483,62.649 CSC2.2@98.768,62.648
CSS2_2: CSS2.2 U29.4 | length 2.4
  Top Layer w0.3: CSS2.2@106.199,121.412 U29.4@108.572,121.412
CVCC3_1: CVCC3.1 CVCC4.1 DVB2.2 RDIV6.2 RDIV7.2 RVCC2.2 U29.12 | length 46.1
  Top Layer w0.3: RDIV7.2@103.289,123.952 103.29,123.368 v1(103.848,122.809) ; v1(111.976,120.142) U29.12@114.11,120.142 CVCC3.1@119.304,120.142 ; CVCC3.1@119.342,120.142 DVB2.2@119.342,123.952 121.628,123.952 122.449,123.132 CVCC4.1@124.549,123.131
  Top Layer w0.5: RDIV7.2@103.289,123.952 100.927,123.952 99.904,122.928 RDIV6.2@99.903,121.539 99.904,115.197 103.848,111.252 RVCC2.2@105.575,111.252
  Bottom Layer w0.3: v1(103.848,122.809) 106.515,120.142 v1(111.976,120.142)
DEMK_1: DEMK.1 QE1.2 QE2.2 RE1.2 RE2.2 | length 88.4
  Top Layer w0.254: v1(55.334,49.911) 55.334,48.692 QE2.2@55.4,48.625 ; v1(60.287,49.911) 60.287,48.692 QE1.2@60.353,48.625
  Top Layer w0.3: RE2.2@54.064,48.653 54.092,48.626 QE2.2@55.4,48.625 ; RE1.2@59.017,48.653 59.045,48.626 QE1.2@60.353,48.625
  Top Layer w0.4: DEMK.1@118.326,64.446 v1(118.326,65.532)
  Bottom Layer w0.8: v1(55.334,49.911) v1(60.287,49.911) 64.097,49.911 66.637,52.451 75.4,52.451 84.163,61.214 90.513,61.214 104.356,75.057 116.802,75.057 118.326,73.533 v1(118.326,65.532)
DMC: U26.40 USB1.A7 USB1.B7 | length 51.6
  Top Layer w0.254: USB1.A7@52.49,60.329 53.307,60.33 53.429,60.452 53.429,61.214 53.302,61.341 USB1.B7@52.49,61.329
  Top Layer w0.3: USB1.B7@52.49,61.329 50.394,61.328 50,61.722 50,72.517 50.635,73.152 80.226,73.152 81.095,72.283 U26.40@81.095,68.559
DPC: U26.39 USB1.A6 USB1.B6 | length 53.4
  Top Layer w0.254: USB1.B6@52.49,59.829 51.651,59.817 51.524,59.944 51.524,60.706 51.646,60.828 USB1.A6@52.49,60.829
  Top Layer w0.3: 51.524,60.706 50.254,60.706 49.492,61.468 49.492,72.771 50.381,73.66 80.48,73.66 81.595,72.545 U26.39@81.595,68.559
DQH2_2: DQH2.2 QH2.1 RQH2.2 | length 37.3
  Top Layer w0.3: RQH2.2@119.596,102.477 120.371,103.251 DQH2.2@120.866,103.251 v1(120.866,104.521)
  Top Layer w1: v1(89.37,104.521) 89.37,102.88 QH2.1@89.376,102.874
  Bottom Layer w1: v1(89.37,104.521) 90.894,106.045 119.342,106.045 v1(120.866,104.521)
DVCC1_1: DVCC1.1 RVCC1.1 | length 1.6
  Top Layer w0.3: RVCC1.1@106.566,88.011 DVCC1.1@108.166,88.011
FCAP: RCAP.1 U26.34 | length 7.9
  Top Layer w0.3: U26.34@83.254,66.904 86.421,66.904 86.83,67.31 89.878,67.31 90.125,67.556 RCAP.1@90.124,68.326